# Altium PCB PlacaMãe.PcbDoc
Units mil, origin at the board's own origin, x right, y up, seen from the top; angles counter-clockwise.
Board outline 1560 x 3520 mil, 2 copper layers (Top Layer, Bottom Layer); 32 components, 25 nets, 148 pads, 54 vias.
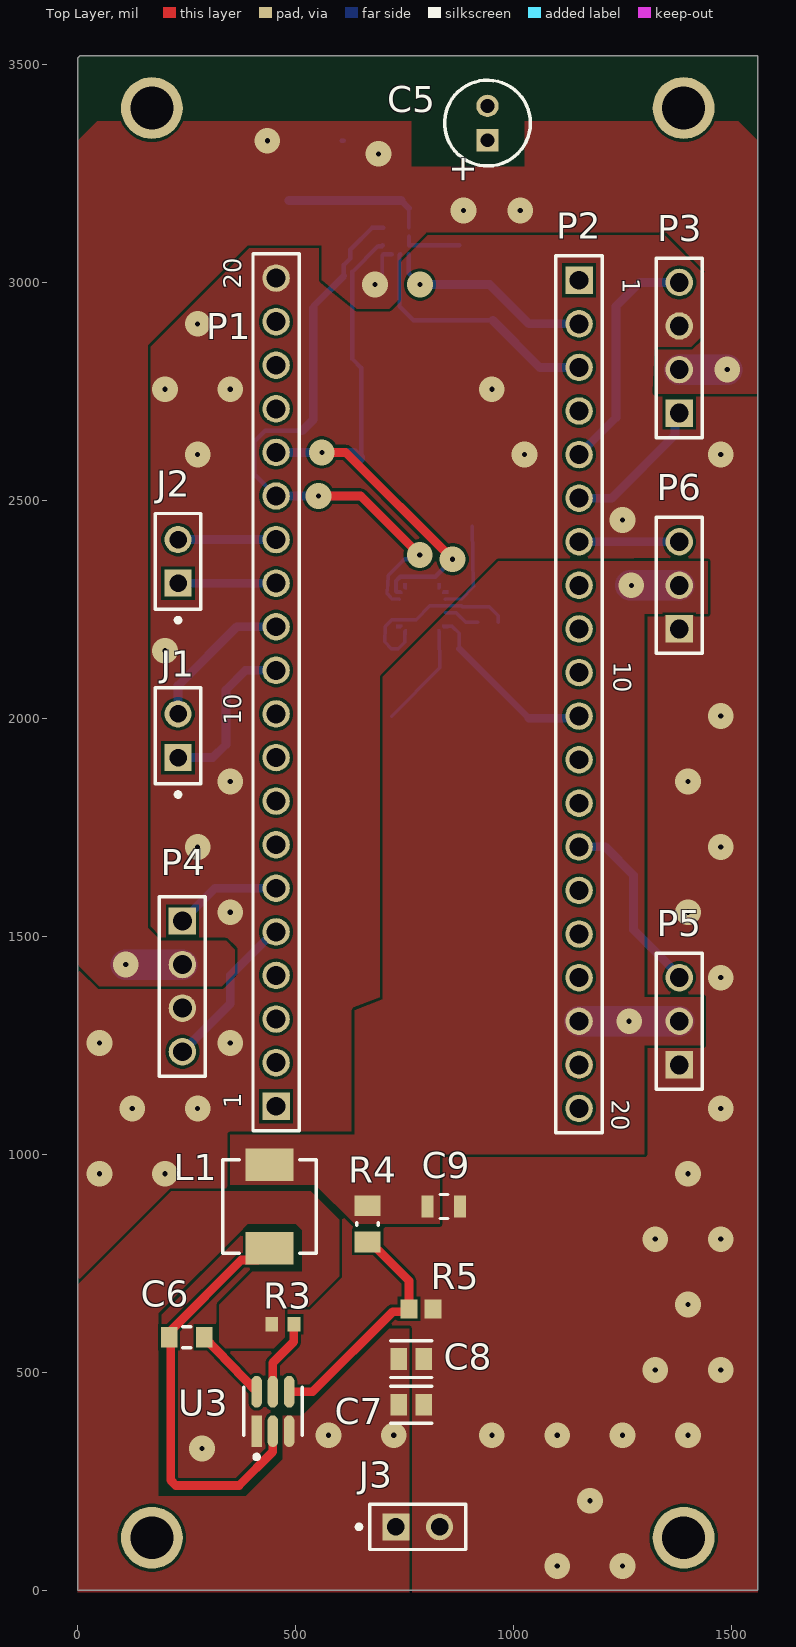
[diagram p0: Top Layer view]
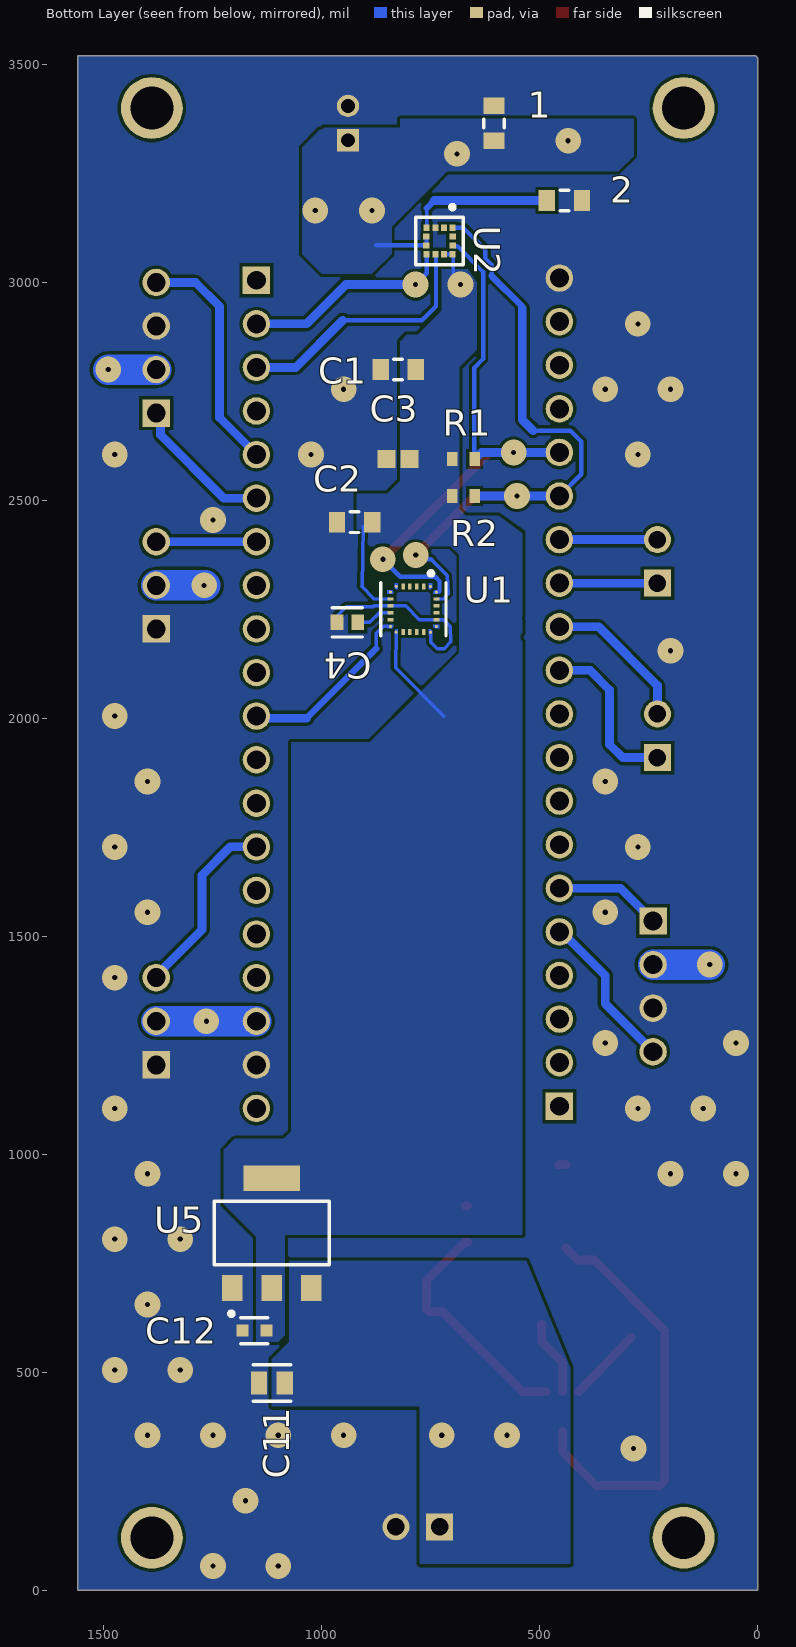
[diagram p1: Bottom Layer view, seen from below]
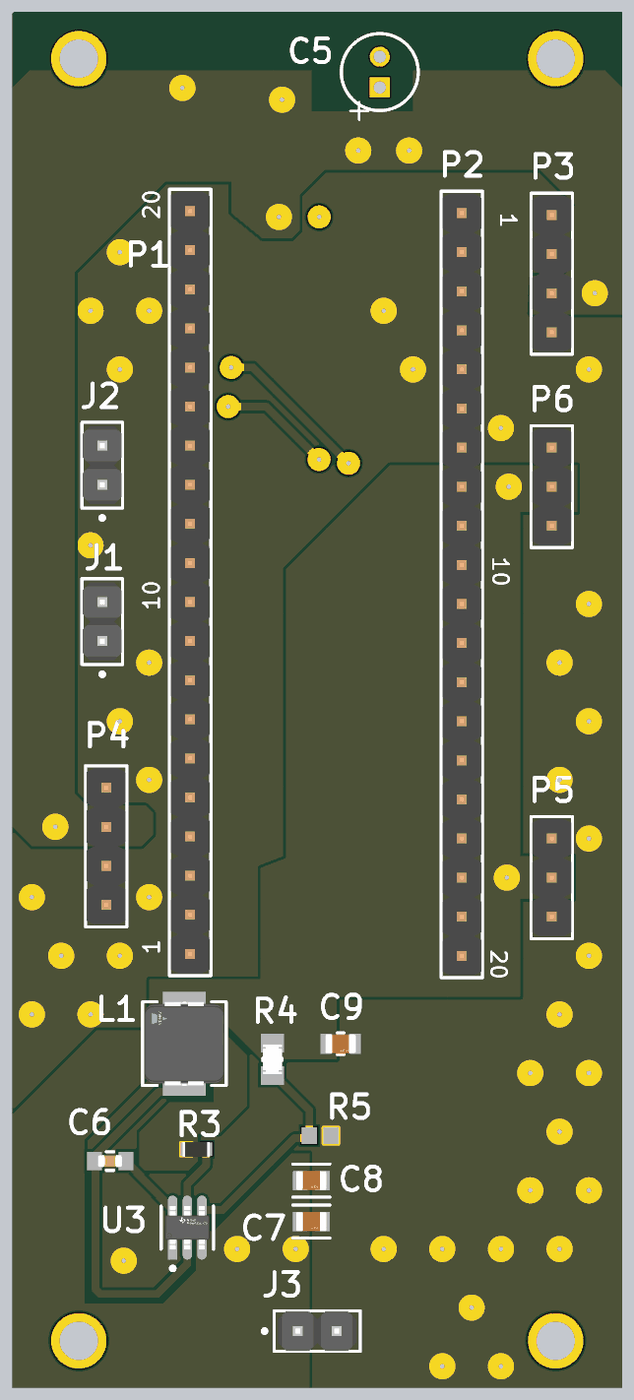
[diagram p2: 3D render of the assembled board from above, using the file's embedded part models]
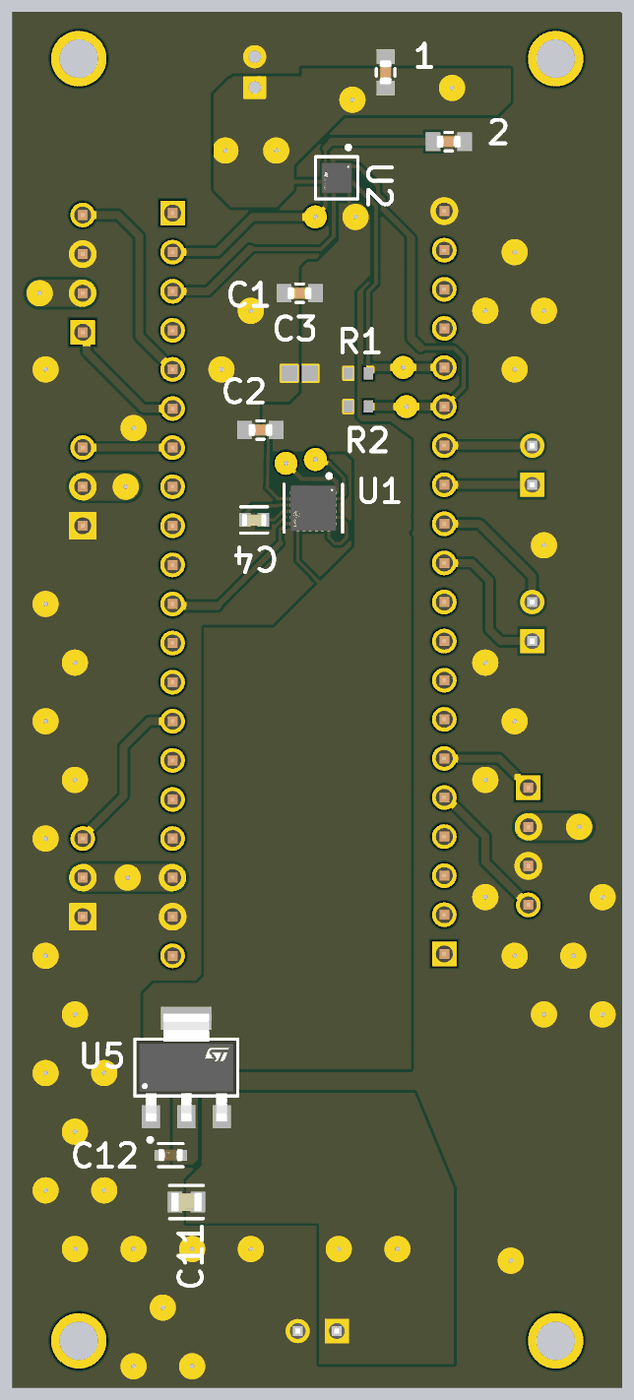
[diagram p3: 3D render of the assembled board from below, using the file's embedded part models]

## Layer stack, top to bottom
Top Solder: solder mask 0.4, Solder Resist, Dk 3.5
Top Layer: signal copper 1.4
Dielectric 1: dielectric 12.6, FR-4, Dk 4.8
Bottom Layer: signal copper 1.4
Bottom Solder: solder mask 0.4, Solder Resist, Dk 3.5

## Board outline
0,0 0,3515 5,3520 1560,3520 1560,0

## Design rules (kind name [scope] priority, off if disabled: settings)
Clearance [All] p1: gap=7 ignorepadtopadclearanceinfootprint=FALSE except(0: Arc-Hole Track-Hole SMDPad-Hole THPad-Hole Via-Hole Fill-Hole Poly-Hole Region-Hole Text-Hole; 5.9: Arc-SMDPad Track-SMDPad SMDPad-SMDPad; 10: Arc-THPad Arc-Text Track-THPad Track-Text SMDPad-THPad SMDPad-Text THPad-THPad THPad-Via THPad-Text Via-Text Fill-Text Poly-Text Region-Text Text-Text)
MinimumSolderMaskSliver [All] p1: minsoldermaskwidth=5
PlaneConnect [All] p1: planeconnectstyle=Direct reliefexpansion=20 reliefentries=4 reliefconductorwidth=10 reliefairgap=10
PolygonConnect [All] p1: connectstyle=Direct reliefconductorwidth=10 reliefentries=4 polygonreliefangle="90 Angle" airgapwidth=10
RoutingVias [All] p1: holewidth=28 width=50 viastyle="Through Hole" minholewidth=11.81 minwidth=59.06 maxholewidth=11.81 maxwidth=59.06
SilkToSolderMaskClearance [IsPad] p1: minsilkscreentomaskgap=7 clearancetoexposedcopper=TRUE
SolderMaskExpansion [All] p1: expansion=4 istentingtop=FALSE
Width [All] p1: maxlimit=200 minlimit=8 preferedwidth=20
27 further rules are at their usual default settings.

## Classes and differential pairs
component class PlacaMãe_Raw: C6 C7 C8 C9 C11 C12 J1 J2 J3 L1 P1 P2 P3 P4 P5 P6 R3 R4 R5 U3 U5
component class IMU: 1 2 C1 C2 C3 C4 C5 R1 R2 U1 U2

## Components (designator, comment, footprint, x,y, rotation, side; value= is the part's Value field where it differs from the comment)
1 "100nF 50V" FP-CGA3E-0_3-0_1-IPC_A 605,3365 r90 bottom
2 "100nF 50V" FP-CGA3E-0_3-0_1-IPC_A 443.56,3187.82 r180 bottom
C1 "100nF, 50V" FP-CGA3E-0_3-0_1-IPC_A 825,2800 r0 bottom
C2 "100nF, 50V" FP-CGA3E-0_3-0_1-IPC_A 925,2450 r0 bottom
C3 "1uF, 50V" CAPC1608X90X35ML10T25 825,2595 r180 bottom
C4 "470nF, 16V" FP-C0603C-CF-MFG 941.38,2220 r0 bottom value="0.47 μF"
C5 "1uF, 50V" CAPPR55-200-1100X500X1200 940,3365.63 r90 top
C6 "100nF, 50V" FP-CGA3E-0_3-0_1-IPC_A 250,580 r180 top
C7 "10uF, 16V" FP-GRM21B-0_1-IPC_C 765,425 r0 top
C8 "10uF, 16V" FP-GRM21B-0_1-IPC_C 765,530 r0 top
C9 "22uF 6,3V" FP-GRM21B-0_15-MFG 839.84,880 r0 top
C11 "100nF 50V" FP-C0805C-DN-MFG 1114.53,475 r0 bottom value="0.10 μF"
C12 "10uF, 10V" FP-C1608-080-MFG 1155,595 r0 bottom value=10uF
J1 "motor 1" FP-M20-9990246-MFG 230,1960 r90 top
J2 "motor 2" FP-M20-9990246-MFG 230,2360 r90 top
J3 "M20-9990246" FP-M20-9990246-MFG 780,145 r0 top
L1 "4.7uH, 1,2A" FP-IHLP-2020BZ-FP_1_905x2-MFG 440,880 r90 top
P1 "61302011121" 61302011121 455,2060 r90 top
P2 "61302011121" 61302011121 1150,2055 r270 top
P3 "encoder 1" 61300411121 1380,2850 r90 top
P4 "encoder 2" 61300411121 240,1385 r270 top
P5 "esc" 61300311121 1380,1305 r90 top
P6 "receiver" 61300311121 1380,2305 r90 top
R1 "4k7, 0.1W" RESC1608X55X25LL10T15 675,2595 r0 bottom
R2 "4k7, 0.1W" RESC1608X55X25LL10T15 675,2510 r0 bottom
R3 "10kOhm" RESC1609X55X30LL15T15 470.59,610 r0 top
R4 "5.6k 1%" FP-CRCW0805-e3-IPC_A 665,840 r90 top
R5 "10kOhm" RESC1608X55X30ML20T20 787.44,645 r180 top
U1 "BHI160B" FP-BHI160B-MFG 790,2250 r270 bottom
U2 "LIS3MDLTR" FP-VFLGA-12-8365767-MFG 730,3095 r270 bottom
U3 "TPS562201DDCR" FP-DDC0006A-IPC_A 447.6,409.71 r90 top
U5 "LD1117S33CTR" FP-SOT-223-0046067_14-MFG 1115,819.02 r90 bottom

## Footprints (in the part's own frame and the unit in brackets; to place one, negate y for a bottom-side part, rotate by r counter-clockwise, add the part's x,y. Pads: shape width x height; smd on the part's side, far side on the other; paste and mask are expansions set on the pad)
61300311121 [mm] "Pin Header, pitch 2.54 mm, THT, Vertical, single row, 3p"
  rect 1.6x1.6 hole 1.1: 1(-2.54,0)
  round 1.6 hole 1.1: 2(0,0) 3(2.54,0)
  silkscreen extent -3.96,-1.35 3.96,1.35, body extent -3.81,-1.27 3.81,1.27, height 8.57
61300411121 [mm] "Pin Header, pitch 2.54 mm, THT, Vertical, single row, 4p"
  rect 1.6x1.6 hole 1.1: 1(-3.81,0)
  round 1.6 hole 1.1: 2(-1.27,0) 3(1.27,0) 4(3.81,0)
  silkscreen extent -5.23,-1.35 5.23,1.35, body extent -5.08,-1.27 5.08,1.27, height 8.57
61302011121 [mm] "Pin Header, pitch 2.54 mm, THT, Vertical, single row, 20p"
  rect 1.6x1.6 hole 1.1: 1(-24.13,0)
  round 1.6 hole 1.1: 2(-21.59,0) 3(-19.05,0) 4(-16.51,0) 5(-13.97,0) 6(-11.43,0) 7(-8.89,0) 8(-6.35,0) 9(-3.81,0) 10(-1.27,0) 11(1.27,0) 12(3.81,0) 13(6.35,0) 14(8.89,0) 15(11.43,0) 16(13.97,0) 17(16.51,0) 18(19.05,0) 19(21.59,0) 20(24.13,0)
  silkscreen extent -25.55,-1.35 25.55,1.35, body extent -25.4,-1.27 25.4,1.27, height 8.57
CAPC1608X90X35ML10T25 [mm] "Chip Capacitor, 2-Leads, Body 1.70x0.90mm, IPC Low Density"
  rect 1.05x1.05 smd: 1(-0.675,0) 2(0.675,0)
  body extent -0.85,-0.45 0.85,0.45, height 0.9
CAPPR55-200-1100X500X1200 [mm] "THD, 2-Leads, Dia 5mm, Body Length 11mm"
  rect 1.3x1.3 hole 0.8: 1(-1,0)
  round 1.3 hole 0.8: 2(1,0)
  silkscreen extent -2.5,-2.5 2.5,2.5, body extent -2.5,-2.5 2.5,2.5, height 12
FP-BHI160B-MFG [mm]
  round 0.18 smd paste+0 mask+0: 1(-1.335,1) 6(-1.335,-1) 7(-1,-1.335) 12(1,-1.335) 13(1.335,-1) 18(1.335,1) 19(1,1.335) 24(-1,1.335)
  rect 0.35x0.2 smd paste+0 mask+0: 2(-1.335,0.6) 3(-1.335,0.2) 4(-1.335,-0.2) 5(-1.335,-0.6) 14(1.335,-0.6) 15(1.335,-0.2) 16(1.335,0.2) 17(1.335,0.6)
  rect 0.2x0.35 smd paste+0 mask+0: 8(-0.6,-1.335) 9(-0.2,-1.335) 10(0.2,-1.335) 11(0.6,-1.335) 20(0.6,1.335) 21(0.2,1.335) 22(-0.2,1.335) 23(-0.6,1.335)
  Top Layer region: -1.16,0.9 -1.51,0.9 -1.51,1.1 -1.241,1.1 -1.16,1.019
  Top Layer region: -1.16,-0.9 -1.51,-0.9 -1.51,-1.1 -1.241,-1.1 -1.16,-1.019
  Top Layer region: 1.16,-0.9 1.51,-0.9 1.51,-1.1 1.241,-1.1 1.16,-1.019
  Top Layer region: 1.16,0.9 1.51,0.9 1.51,1.1 1.241,1.1 1.16,1.019
  Top Layer region: -0.9,-1.16 -0.9,-1.51 -1.1,-1.51 -1.1,-1.241 -1.019,-1.16
  Top Layer region: 0.9,-1.16 0.9,-1.51 1.1,-1.51 1.1,-1.241 1.019,-1.16
  Top Layer region: 0.9,1.16 0.9,1.51 1.1,1.51 1.1,1.241 1.019,1.16
  Top Layer region: -0.9,1.16 -0.9,1.51 -1.1,1.51 -1.1,1.241 -1.019,1.16
  silkscreen extent -2.22,-1.9 1.55,1.9, body extent -1.5,-1.5 1.5,1.5, height 1
FP-C0603C-CF-MFG [mm] "Chip Capacitor, 2-Leads, Body 2.00x1.25mm, IPC Medium Density"
  rect 0.75x0.9 smd paste+0 mask+0: 1(-0.6,0) 2(0.6,0)
  silkscreen extent -0.87,-0.85 0.88,0.85, body extent -0.8,-0.4 0.8,0.4, height 0.87
FP-C0805C-DN-MFG [mm]
  rect 0.95x1.35 smd paste+0 mask+0: 1(-0.75,0) 2(0.75,0)
  silkscreen extent -1.1,-1.07 1.1,1.07, body extent -1,-0.63 1,0.62, height 0.88
FP-C1608-080-MFG [mm]
  rect 0.7x0.7 smd paste+0 mask+0: 1(-0.7,0) 2(0.7,0)
  silkscreen extent -0.8,-0.75 0.8,0.75, body extent -0.8,-0.4 0.8,0.4, height 0.9
FP-CGA3E-0_3-0_1-IPC_A [mm]
  rect 0.956x1.206 smd paste+0 mask+0: 1(-1.025,0) 2(1.025,0)
  silkscreen extent -0.25,-0.6 0.25,0.6, body extent -0.8,-0.4 0.8,0.4, height 1.1
FP-CRCW0805-e3-IPC_A [mil]
  rect 47.5x59.38 smd paste+0 mask+0: 1(-41.37,0) 2(41.37,0)
  silkscreen extent -3,-25 3,25, body extent -39,-25 39,25, height 20
FP-DDC0006A-IPC_A [mm]
  rect 1.854x0.612 smd paste+0 mask+0: 1(-1.15,0.95)
  rrect100% 1.854x0.612 smd paste+0 mask+0: 2(-1.15,0) 3(-1.15,-0.95) 4(1.15,-0.95) 5(1.15,0) 6(1.15,0.95)
  silkscreen extent -2.77,-1.7 1.4,1.7, body extent -1.4,-1.45 1.4,1.45, height 1.1
FP-GRM21B-0_1-IPC_C [mil]
  rect 37.71x49.69 smd paste+0 mask+0: 1(-28.63,0) 2(28.63,0)
  silkscreen extent -47,-42 47,42, body extent -39,-25 39,25, height 53
FP-GRM21B-0_15-MFG [mm]
  rect 0.7x1.3 smd paste+0 mask+0: 1(-0.95,0) 2(0.95,0)
  silkscreen extent -0.23,-0.7 0.23,0.7, body extent -1,-0.62 1,0.62, height 1.4
FP-IHLP-2020BZ-FP_1_905x2-MFG [mm]
  rect 1.905x2.79 smd paste+0 mask+0: 1(-2.425,0) 2(2.425,0)
  silkscreen extent -2.72,-2.72 2.72,2.72, body extent -2.74,-2.59 2.74,2.59, height 2
FP-M20-9990246-MFG [mm]
  rect 1.57x1.57 hole 1.02 paste-1000 mask+0: 1(-1.27,0)
  round 1.57 hole 1.02 paste-1000 mask+0: 2(1.27,0)
  silkscreen extent -3.55,-1.32 2.79,1.32, body extent -2.89,-1.42 2.89,1.42, height 0.25
FP-SOT-223-0046067_14-MFG [mm]
  rect 1.5x1.2 smd paste+0 mask+0: 1(-3.2,2.3) 2(-3.2,0) 3(-3.2,-2.3)
  rect 1.5x3.3 smd paste+0 mask+0: 4(3.2,0)
  silkscreen extent -4.82,-3.35 1.85,3.35, body extent -3.5,-3.25 3.5,3.25, height 1.9
FP-VFLGA-12-8365767-MFG [mm]
  rect 0.375x0.35 smd paste+0 mask+0: 1(-0.763,0.75) 2(-0.763,0.25) 3(-0.763,-0.25) 4(-0.763,-0.75) 7(0.763,-0.75) 8(0.763,-0.25) 9(0.763,0.25) 10(0.763,0.75)
  rect 0.35x0.375 smd paste+0 mask+0: 5(-0.25,-0.763) 6(0.25,-0.763) 11(0.25,0.763) 12(-0.25,0.763)
  silkscreen extent -2.1,-1.38 1.38,1.38, body extent -1,-1 1,1, height 1
RESC1608X55X25LL10T15 [mm] "Chip Resistor, 2-Leads, Body 1.60x0.80mm, IPC High Density"
  rect 0.6x0.8 smd: 1(-0.65,0) 2(0.65,0)
  body extent -0.85,-0.45 0.85,0.45, height 0.55
RESC1608X55X30ML20T20 [mm] "Chip Resistor, 2-Leads, Body 1.60x0.80mm, IPC Low Density"
  rect 1x1.1 smd: 1(-0.7,0) 2(0.7,0)
  body extent -0.9,-0.5 0.9,0.5, height 0.55
RESC1609X55X30LL15T15 [mm] "Chip Resistor, 2-Leads, Body 1.75x0.95mm, IPC High Density"
  rect 0.75x0.85 smd: 1(-0.65,0) 2(0.65,0)
  body extent -0.87,-0.47 0.88,0.48, height 0.55

## Part data
1 2 C1 C2 C6: library part CMP-2000-07546-2, "Cap Ceramic 100nF 50V X7R 10% Pad SMD 0603 +125°C Automotive T/R", Capacitance=100nF, Case Code (Imperial)=0603, Case Code (Metric)=1608, Dielectric=X7R, Max Operating Temperature=125°C, Min Operating Temperature=-55°C, Package Quantity=1, Ratings=AEC-Q200, Tolerance=10%, Voltage=50V, Case/Package=0603, Composition=Ceramic, Depth=0.8mm, Height=0.8mm, Lead Free="Lead Free", Length=1.6mm, Mount="Surface Mount", Packaging="Tape and Reel", Radiation Hardening=No, REACH SVHC="No SVHC", Termination=SMD/SMT, Thickness=0.035inch, Voltage Rating=50V, Voltage Rating (DC)=50V, Weight=7.1E-05oz, Width=0.8mm
C3: library part CMP-2000-05447-1, "Chip Capacitor, 1 uF, +/- 10%, 50 V, -55 to 85 degC, 0603 (1608 Metric), RoHS, Tape and Reel", Capacitance=1µF, Manufacturer="Taiyo Yuden", Operating Temperature=-55degC~85degC, Package / Case=0603(1608Metric), Package Description="2-Pin Surface Mount Device, Body 1.6 x 0.8 mm", Package Reference=603, Ratings=-, Standard Package=1, Temperature Coefficient=X5R, Tolerance=±10%, Voltage - Rated=50V, Applications=GeneralPurpose, Catalog Drawings=xMKSeries_0603_0.8, Category=Capacitors, Datasheet URL=https://datasheet.ciiva.com/15922/336umk107bj105ka-t-15922611.pdf, Datasheet Version=Mar-13, Family=CeramicCapacitors, Features=-, Height - Seated (Max)=-, Lead Spacing=-, Lead Style=-, Manufacturer URL=http://www.t-yuden.com/, Mounting Type=SurfaceMount,MLCC, Online Catalog=MSeries, Other Names=587-2400-6, Packaging=Digi-Reel, Series=M, Size / Dimension="0.063\"Lx0.031\"W(1.60mmx0.80mm)", Thickness (Max)="0.035\"(0.90mm)"
C4: library part CMP-2006-03235-2, "CAP CER 0.47UF 16V X7R 0603", Capacitance="0.47 μF", Manufacturer=KEMET, Manufacturer Part Number=C0603C474K4RACTU, Package=C0603C-CF, Temperature="-55°C to +125°C", Temperature Characteristic=X7R, Temperature Coefficient=30ppm/°C, Temperature Range High=+125°C, Temperature Range Low=-55°C, Tolerance=0.1, Voltage Rating="16 V", Automotive=Yes, Automotive Grade="Grade 1", Category=Cap, ComponentLink2Description=Datasheet, ComponentLink2URL=https://api.kemet.com/component-edge/download/datasheet/C0603C100J5GACAUTO.pdf, Device Class L1="Passive Components", Device Class L2=Capacitors, Device Class L3="Ceramic Capacitors", Digikey Description="CAP CER 0.47UF 16V X7R 0603", Height=0.87mm, Lead Free=Yes, Material=Ceramic, Mouser Description="0603 C 470nF Ceramic Multilayer Capacitor, 16 V, +125degC, X7R Dielec, +/-10%", Octopart=https://octopart.com/c0603c474k4ractu-kemet-109683, RoHS=TRUE
C5: library part CMP-1665-00039-1, "Aluminum Electrolytic Capacitor, 1 uF, +/- 20%, 50 V, -55 to 105 degC, 2-Pin THD, RoHS, Bulk", Max Operating Temperature="70 degC", Min Operating Temperature="-30 degC", Package Quantity=150, Channels=2, ComponentLink1Description="Manufacturer URL", ComponentLink1URL=http://www.panasonic.com/, ComponentLink2Description=Datasheet, ComponentLink2URL=https://datasheet.ciiva.com/7275/94060-7275472.pdf, DatasheetVersion=Mar-05, Mount="Through Hole", PackageDescription="2-Pin Radial Lead, Dia 5 mm, Body Length 11 mm", PackageReference=CAPPR55-200-1100X500X1200, Packaging=Bulk, Radiation Hardening=No, RoHSCompliant=true
C7 C8: library part CMP-2007-03453-2, "Chip Multilayer Ceramic Capacitors for General Purpose, 0805, 10uF, X5R, 15%, 10%, 16V", Capacitance=10uF, Case Code (Imperial)=0805, Case Code (Metric)=2012, Dielectric=X5R, Max Operating Temperature=85°C, Min Operating Temperature=-55°C, Package Quantity=1, Tolerance=10%, Voltage=16V, Case/Package=0805, Depth=1.25mm, Height=1.25mm, Lead Free="Lead Free", Length=2mm, Material=Ceramic, Mount="Surface Mount", Packaging="Tape and Reel", Radiation Hardening=No, REACH SVHC="No SVHC", Termination=SMD/SMT, Thickness=0.053inch, Voltage Rating=16V, Voltage Rating (DC)=16V, Width=1.25mm
C9: library part CMP-2007-03385-2, "Chip Multilayer Ceramic Capacitors for General Purpose, 0805, 22uF, X5R, 15%, 20%, 6.3V", Capacitance=22uF, Case Code (Imperial)=0805, Case Code (Metric)=2012, Dielectric=X5R, Max Operating Temperature=85°C, Min Operating Temperature=-55°C, Package Quantity=1, Tolerance=20%, Voltage=6.3V, Case/Package=0805, Depth=1.25mm, Height=1.25mm, Lead Free="Lead Free", Length=2mm, Material=Ceramic, Mount="Surface Mount", Packaging="Tape and Reel", Radiation Hardening=No, REACH SVHC="No SVHC", Termination=SMD/SMT, Thickness=0.053inch, Voltage Rating=6.3V, Voltage Rating (DC)=6.3V, Width=0.049inch
C11: library part CMP-2007-00279-2, "CAP CER 0.1UF 50V X7R 0805", Capacitance="0.10 μF", Manufacturer=KEMET, Manufacturer Part Number=C0805C104K5RACTU, Package=C0805C-DN, Temperature="-55°C to +125°C", Temperature Characteristic=X7R, Temperature Coefficient=30ppm/°C, Temperature Range High=+125°C, Temperature Range Low=-55°C, Tolerance=0.1, Voltage Rating="50 V", Automotive=No, Category=Cap, ComponentLink2Description=Datasheet, ComponentLink2URL=https://content.kemet.com/datasheets/KEM_C1003_C0G_SMD.pdf, Device Class L1="Passive Components", Device Class L2=Capacitors, Device Class L3="Ceramic Capacitors", Digikey Description="CAP CER 0.1UF 50V X7R 0805", Height=0.88mm, Ipc Land Pattern Name=CAPC200125X78, Lead Free=Yes, Material=Ceramic, Mouser Description="Cap Ceramic 0.1uF 50V X7R 10% SMD 2.0 x 1.2 mm 125 C Paper T/R", Octopart=https://octopart.com/c0805c104k5ractu-kemet-143926, RoHS=TRUE
C12: library part CMP-2000-04979-2, "CAP CER 10UF 10V X5R 0603", Capacitance=10uF, Manufacturer=TDK, Manufacturer Part Number=C1608X5R1A106K080AC, Package=C1608-080, Temperature="-55°C to +85°C", Temperature Characteristic=X5R, Temperature Coefficient=15%, Temperature Range High=+85°C, Temperature Range Low=-55°C, Tolerance=10%, Voltage=10V, Automotive=No, Category=Cap, ComponentLink2Description=Datasheet, ComponentLink2URL=https://product.tdk.com/info/en/documents/chara_sheet/C1608X5R1A106K080AC.pdf, Device Class L1="Passive Components", Device Class L2=Capacitors, Device Class L3="Ceramic Capacitors", Digikey Description="CAP CER 10UF 10V X5R 0603", Footprint Url=https://product.tdk.com/info/en/catalog/spec/mlccspec_commercial_general_midvoltage_en.pdf, Height=0.9mm, Ipc Land Pattern Name=CAPC16080X80, Lead Free=Yes, Material=Ceramic, Mouser Description="CAP CER 10UF 10V X5R 0603", Octopart=https://octopart.com/c1608x5r1a106k080ac-tdk-26013468, RoHS=TRUE, Voltage Rating=10V
J1 J2: library part CMP-15831-000009-1, "CONN HEADER VERT 2POS 2.54MM", Current Rating=3A, Manufacturer=Harwin, Manufacturer Part Number=M20-9990246, Temperature="-40°C to +105°C", Temperature Range High=+105°C, Temperature Range Low=-40°C, Automotive=No, Category=Conn, ComponentLink2Description=Datasheet, ComponentLink2URL=https://cdn.harwin.com/pdfs/M20-999.pdf, Conn Gender=Male, Conn Orientation=Vertical, Contact Material=Tin,Nickel, Device Class L1=Connectors, Device Class L2="Headers and Wire Housings", Device Class L3=unset, Digikey Description="CONN HEADER VERT 2POS 2.54MM", Height=8.99mm, Lead Free=Yes, Mouser Description="2.54mm (0.1\") Pitch SIL Vertical PC Tail Pin Header, 6.1mm mating pin height, tin, 2 contacts", Number Of Contacts=2, Number Of Rows=1, Octopart=https://octopart.com/m20-9990246-harwin-2590635, Package=M20-9990246, Pitch=2.54mm, RoHS=TRUE
J3: library part CMP-15831-000009-1, "CONN HEADER VERT 2POS 2.54MM", Current Rating=3A, Manufacturer=Harwin, Temperature="-40°C to +105°C", Temperature Range High=+105°C, Temperature Range Low=-40°C, Automotive=No, Category=Conn, ComponentLink2Description=Datasheet, ComponentLink2URL=https://cdn.harwin.com/pdfs/M20-999.pdf, Conn Gender=Male, Conn Orientation=Vertical, Contact Material=Tin,Nickel, Device Class L1=Connectors, Device Class L2="Headers and Wire Housings", Device Class L3=unset, Digikey Description="CONN HEADER VERT 2POS 2.54MM", Height=8.99mm, Lead Free=Yes, Manufacturer Part Number=M20-9990246, Mouser Description="2.54mm (0.1\") Pitch SIL Vertical PC Tail Pin Header, 6.1mm mating pin height, tin, 2 contacts", Number Of Contacts=2, Number Of Rows=1, Octopart=https://octopart.com/m20-9990246-harwin-2590635, Package=M20-9990246, Pitch=2.54mm, RoHS=TRUE
L1: library part CDRH2D18_HPNP-4R7NC, "Inductor", Arrow Part Number=CDRH2D18/HPNP-4R7NC, Manufacturer_Name=Sumida, Mouser Part Number=851-CDRH2D18HP-4R7NC, Arrow Price/Stock=https://www.arrow.com/en/products/cdrh2d18hpnp-4r7nc/sumida, Datasheet Link=https://products.sumida.com/products/pdf/CDRH2D18HP.pdf, Height=1mm, Manufacturer_Part_Number=CDRH2D18/HPNP-4R7NC, Mouser Price/Stock=https://www.mouser.co.uk/ProductDetail/Sumida/CDRH2D18-HPNP-4R7NC?qs=%2Fk4tzQy0az%2FNmO92%2F%252BEfMw%3D%3D
P1 P2: library part CMP-1502-01102-1, "THT Vertical Pin Header WR-PHD, Pitch 2.54 mm, Single Row, 20 pins", Contact Resistance=20mOhm, Manufacturer="Wurth Elektronik", Operating Temperature=-40to105degC, Rated Current=3A, Withstanding Voltage=500VAC, Working Voltage=250VAC, Datasheet URL=https://katalog.we-online.de/em/datasheet/6130xx11121.pdf, Gender=Male, Manufacturer URL=http://www.we-online.de, Mounting Technology=THT, Orientation=Vertical, Package Reference=61302011121, Packaging=Bag, Part Number=61302011121, Pin Number=20, Pitch=2.54mm, Publisher=WurthElektronik, Row Number=Single
P3 P4: library part CMP-1502-01064-1, "THT Vertical Pin Header WR-PHD, Pitch 2.54 mm, Single Row, 4 pins", Contact Resistance=20mOhm, Manufacturer="Wurth Elektronik", Operating Temperature=-40to105degC, Package Reference=61300411121, Rated Current=3A, Withstanding Voltage=500VAC, Working Voltage=250VAC, Datasheet URL=https://katalog.we-online.de/em/datasheet/6130xx11121.pdf, Gender=Male, Manufacturer URL=http://www.we-online.de, Mounting Technology=THT, Orientation=Vertical, Packaging=Bag, Part Number=61300411121, Pin Number=4, Pitch=2.54mm, Publisher=WurthElektronik, Row Number=Single
P5 P6: library part CMP-1502-01062-1, "THT Vertical Pin Header WR-PHD, Pitch 2.54 mm, Single Row, 3 pins", Contact Resistance=20mOhm, Manufacturer="Wurth Elektronik", Operating Temperature=-40to105degC, Package Reference=61300311121, Rated Current=3A, Withstanding Voltage=500VAC, Working Voltage=250VAC, Datasheet URL=https://katalog.we-online.de/em/datasheet/6130xx11121.pdf, Gender=Male, Manufacturer URL=http://www.we-online.de, Mounting Technology=THT, Orientation=Vertical, Packaging=Bag, Part Number=61300311121, Pin Number=3, Pitch=2.54mm, Publisher=WurthElektronik, Row Number=Single
R1 R2: library part CMP-2000-06942-1, "Chip Resistor, 4.7 KOhm, +/- 1%, 0.1 W, -55 to 155 degC, 0603 (1608 Metric), RoHS, Tape and Reel", Case Code - in=0603, Case Code - mm=1608, Manufacturer=Yageo, Operating Temperature Range=-55Cto+155C, Package Description="2-Pin Surface Mount Device, Body 1.6 x 0.8 mm", Power Rating=100mW, Resistance=4.7kOhms, Temperature Coefficient=100PPM/C, Tolerance=1%, Voltage Rating=50V, Datasheet URL=http://www.yageo.com/documents/recent/PYu-RC_Group_51_RoHS_L_7.pdf, Datasheet Version="Rev. 7, 05/2017", Manufacturer URL=http://www.yageo.com/, Mounting Technology=SurfaceMount, Package Reference=0603, Packaging=Reel, Product=ThickFilmResistorsGeneralPurpose, Series=RC, Termination Style=SMD/SMT
R3: library part CMP-1012-00623-3, "Chip Resistor, 10 KOhm, +/- 1%, 0.1 W, -55 to 155 degC, 0603 (1608 Metric), RoHS, Tape and Reel", Case Code (Imperial)=0603, Case Code (Metric)=1608, Manufacturer=Panasonic, Max Operating Temperature=155degC, Max Power Dissipation=100mW, Min Operating Temperature=-55degC, Package Description="2-Pin Surface Mount Device, Body 1.6 x 0.85 mm", Package Quantity=1, Package Reference=603, Resistance=10KOhm, Temperature Coefficient=100ppm\/degreesC, Tolerance=1%, Voltage Rating=75V, Case\/Package=0603, Composition=ThickFilm, Contact Plating=Tin, Datasheet URL=https://industrial.panasonic.com/cdbs/www-data/pdf/RDA0000/AOA0000C304.pdf, Datasheet Version=02/2017, Depth=0.8mm, Height=0.45mm, Lead Free=LeadFree, Length=1.6mm, Manufacturer URL=http://www.panasonic.com/, Military Standard=Not, Mount=SurfaceMount, Mounting Technology=SurfaceMount, Number of Pins=2, Number of Terminations=2, Packaging=TapeandReel, Power Rating=100mW, Radiation Hardening=No, REACH SVHC=NoSVHC, RoHSCompliant=true, Termination=SMD/SMT, Voltage Rating (DC)=75V, Width=0.031inch
R4: library part CMP-2001-04030-2, "RES Thick Film, 5.6kΩ, 1%, 0.125W, 100ppm/°C, 0805", Case Code (Imperial)=0805, Case Code (Metric)=2012, Max Operating Temperature=155°C, Max Power Dissipation=125mW, Min Operating Temperature=-55°C, Package Quantity=1, Resistance=5.6kR, Temperature Coefficient=100ppm/°C, Tolerance=1%, Voltage Rating=150V, Case/Package=0805, Composition="Thick Film", Contact Plating=Tin, Depth=1.25mm, Features="Automotive AEC-Q200", Height=0.45mm, Lead Free="Lead Free", Length=2mm, Military Standard=Not, Mount="Surface Mount", Number of Pins=2, Number of Terminations=2, Packaging="Tape and Reel", Power Rating=125mW, Radiation Hardening=No, Termination=SMD/SMT, Voltage Rating (DC)=150V, Weight=0.000194oz, Width=1.25mm
R5: library part CMP-2000-00874-1, Manufacturer=Panasonic, Part Number=ERA-3AEB103V
U1: library part CMP-191067-000004-1, "IMU ACCEL/GYRO 3-AXIS I2C 24LGA", Ambient Temperature Range High=+85°C, Ambient Temperature Range Low=-40°C, Manufacturer="Bosch Sensortec", Max Supply Voltage=3.6V, Min Supply Voltage=1.6V, Operating Supply Current=300-800uA, Package=0, Temperature="-40°C to +85°C", Accel Range=2/4/8/16g, Accel Resolution=16bits, Accel Sensitivity=2048/4096/8192/16384LSB/g, Automotive=No, Category=IC, ComponentLink2Description=Datasheet, ComponentLink2URL=https://ae-bst.resource.bosch.com/media/_tech/media/datasheets/BST-BHI160B-DS000.pdf, Device Class L1=Sensors, Device Class L2="Motion Sensors", Device Class L3="Inertial Measurement Units (IMUs)", Digikey Description="IMU ACCEL/GYRO 3-AXIS I2C 24LGA", Gyro Range=125/250/500/1000/2000°/s, Gyro Sensitivity=16.4/32.8/65.6/131.2/262.4LSB/°/s, Height=1mm, Lead Free=Yes, Manufacturer Part Number=BHI160B, Octopart=https://octopart.com/bhi160b-bosch+sensortec-108216126, Resolution=16bits, RoHS=TRUE, Sensor Output=I2C, Sensor Type=Temperature,Accelerometer,Gyroscope, Temperature Range High=+85°C, Temperature Range Low=-40°C
U2: library part CMP-2000-07463-2, "SENSOR MR I2C/SPI 12LGA", Manufacturer=STMicroelectronics, Max Supply Voltage=3.6V, Min Supply Voltage=1.71V, Operating Supply Current=40-270uA, Package=VFLGA-12-8365767, Temperature="-40°C to +85°C", Temperature Range High=+85°C, Temperature Range Low=-40°C, Automotive=No, Category=IC, ComponentLink2Description=Datasheet, ComponentLink2URL=https://www.st.com/resource/en/datasheet/lis3mdl.pdf, Device Class L1=Sensors, Device Class L2="Magnetic Sensors", Device Class L3=unset, Digikey Description="SENSOR MR I2C/SPI 12LGA", Footprint Url=https://www.st.com/content/ccc/resource/technical/document/technical_note/73/17/9c/16/dd/96/4a/01/CD00134799.pdf/files/CD00134799.pdf/jcr:content/translations/en.CD00134799.pdf, Height=1mm, Lead Free=Yes, Manufacturer Part Number=LIS3MDLTR, Mouser Description="Board Mount Hall Effect / Magnetic Sensors Ultra Lo-Pwr Hi Perf 3-Axis 1.9-3.6V", Octopart=https://octopart.com/lis3mdltr-stmicroelectronics-29403125, RoHS=TRUE, Sensing Method=Magnetic, Sensor Output=I2C,SPI
U3: library part CMP-04918-000361-1, "IC REG BUCK ADJ 2A TSOT23-6", Case/Package=SOT, Max Input Voltage=17V, Max Operating Temperature=125°C, Max Output Current=2A, Min Input Voltage=4.5V, Min Operating Temperature=-40°C, Output Voltage=7V, Quiescent Current=400uA, Switching Frequency=580kHz, Contact Plating=Tin, Lead Free="Lead Free", Mount="Surface Mount", Number Of Outputs=1, Number of Pins=6, Operating Supply Voltage=17V, Output Type=Adjustable, RoHS Compliant=Yes
U5: library part CMP-0244-00307-2, "IC REG LINEAR 3.3V 800MA SOT223", Case/Package=SOT-223, Dropout Voltage=1.1V, Input Bias Current=5mA, Max Input Voltage=15V, Max Operating Temperature=125°C, Max Output Current=1.3A, Max Output Voltage=3.3V, Max Power Dissipation=12W, Min Input Voltage=5.3V, Min Operating Temperature=-40°C, Output Current=950mA, Output Voltage Accuracy=1%, Package Quantity=1, Quiescent Current=10mA, Accuracy=1%, Contact Plating=Tin, Height=1.8mm, Lead Free="Lead Free", Length=6.5mm, Max Supply Voltage=15V, Min Output Voltage=3.3V, Min Supply Voltage=3.3V, Mount="Surface Mount", Nominal Output Voltage=3.3V, Number Of Outputs=1, Number of Pins=4, Number of Regulators=1, Number of Terminals=4, Output Type=Fixed, Output Voltage=3.3V, Packaging="Tape and Reel", Polarity=Positive, Power Dissipation=12W, Radiation Hardening=No, REACH SVHC="No SVHC", Termination=SMD/SMT, Weight=0.01lb, Width=3.5mm

## Free pads (board coordinates)
  round 141.73 hole 98.43: 3(170,120) 3(170,3400) 3(1390,120) 3(1390,3400)

## Via types
v1: diameter 59.06, hole 11.81, Top Layer to Bottom Layer, 54 vias

## Nets (pads, with @x,y where several pads share a name; then routed paths per layer and width w, separated by ;. In a path a pad name is that pad's centre, name@x,y a point inside that pad or via, vN(x,y) a via of type N, cw(c..) or ccw(c..) an arc to the next point about the centre after c; other vN are vias at no path point)
+3.3: 1.1 C1.1 C2.1 C3.2 C5.1 C12.1 P3.2 P4.2 R1.2 R2.2 U1.8 U1.13 U2.5 U2.6 U2.9 U2.10 U5.2 U5.4 | length 939.4
  Bottom Layer w8: v1@677,3000 v1@677,3007.75 ; v1(682,2995) 698.29,3011.29 698.29,3062.8 U2.10 ; 720.66,2004.65 830.19,2116.41 U1.13 ; U1.8 880.83,2274.4 907.51,2302.2 ; 904.69,2440.2 907.51,2302.2 ; 908.71,2303.45 907.51,2302.2
  Bottom Layer w10: 1.1 1.1@609.92,3324.65 ; U2.10 719.67,3064.98 720.16,3064.49 U2.9 ; U2.5 U2.6 875,3085.16
  Bottom Layer w70: v1(110,1435) P4.2 ; P3.2 v1(1490,2800)
  other v1: 885,3165 1015,3165 690,3295 435,3325
+5: C9.1 L1.2 P2.18 P5.2 P6.2 R4.2 | length 368.2
  Top Layer w20: L1.2@440.86,976.35 L1.2 L1.2@457.42,975.49 ; R4.2 R4.2@670.94,881.37 ; P2.18@1149.14,1305.86 P2.18
  Bottom Layer w70: P2.18 v1(1265,1305) P5.2 ; v1@1267.55,2305 v1(1270,2305) P6.2
GND: 1.2 2.2 C1.2 C2.2 C3.1 C4.2 C5.2 C7.2 C8.2 C9.2 C11.2 C12.2 J3.2 P1.20 P2.19 P3.3 P4.3 P5.1 P6.1 R5.1 U1.9 U1.18 U1.20 U2.3 U3.1 U5.1 | length 417.3
  Bottom Layer w8: U1.18 750.29,2174.7 734.92,2159.78 719.55,2160.01 704.49,2175.53 705.01,2210.45 721.66,2226.61 U1.20 776.38,2226.38 807.87,2257.87 U1.9 ; U1.9@845.45,2257.87 880.26,2257.87 882.13,2256 944,2256 965,2235 C4.2
  other v1: 1100,55 1250,55 1175,205 285,325 950,355 1100,355 1250,355 1400,355 1325,505 1475,505 1400,655 1325,805 1475,805 50,955 200,955 1400,955 125,1105 275,1105 1475,1105 50,1255 350,1255 1475,1405 350,1555 1400,1555 275,1705 1475,1705 350,1855 1400,1855 1475,2005 200,2155 1250,2455 275,2605 1025,2605 1475,2605 200,2755 350,2755 950,2755 275,2905
Net2_1: 2.1 U2.4 | length 328.2
  Bottom Layer w8: U2.4 759.53,3170.41
  Bottom Layer w15: 742.12,3187.82 759.53,3170.41
  Bottom Layer w20: 2.1 742.12,3187.82
NetC4_1: C4.1 U1.10 | length 84.4
  Bottom Layer w8: U1.10 867.87,2242.13 890,2220 C4.1
NetC6_1: C6.1 U3.6 | length 173.2
  Top Layer w20: C6.1 U3.6
NetJ1_1: J1.1 P1.11 | length 381.1
  Bottom Layer w20: J1.1 310,1910 340,1940 340,2065 385,2110 P1.11
NetJ1_2: J1.2 P1.12 | length 348.9
  Bottom Layer w10: P1.12 P1.12@457.11,2207.89
  Bottom Layer w20: J1.2 230,2075 365,2210 P1.12
NetJ2_1: J2.1 P1.13 | length 225
  Bottom Layer w20: J2.1 P1.13
NetJ2_2: J2.2 P1.14 | length 225
  Bottom Layer w20: J2.2 P1.14
NetP1_5: P1.5 P4.4 | length 367
  Bottom Layer w20: P4.4 350,1345 350,1410 450,1510 P1.5
NetP1_6: P1.6 P4.1 | length 246.1
  Bottom Layer w20: P4.1 315,1610 P1.6
NetP1_15: P1.15 R2.1 U1.23 U2.1 | length 1471.9
  Top Layer w20: v1(552.1,2510) 649.2,2510 v1(784.6,2374.6)
  Bottom Layer w8: U1.23 720.2,2274.77 709.47,2287.04 710.82,2307.28 712.17,2327.52 747.82,2363.17
  Bottom Layer w10: P1.15 405,2560 405,2635 430,2660 515,2660 ; 610.5,3015 610.5,3040.5 625,3055 625,3075 675.02,3125.02 U2.1 ; 747.82,2363.17 749.86,2365.21 775.21,2365.21 v1(784.6,2374.6)
  Bottom Layer w15: 540,2940 540,2944.5 610.5,3015
  Bottom Layer w20: P1.15 v1(552.1,2510) R2.1 ; 515,2660 540,2685 540,2940
NetP1_16: P1.16 R1.1 U1.24 U2.11 | length 1333.7
  Top Layer w20: v1(560,2610) 615,2610 v1(860,2365)
  Bottom Layer w10: P1.16 P1.16@470,2595 ; R1.1 650,2595.59 650,2804.24 630,2824.24 630,3024.19 689.07,3083.27 698.09,3083.27 U2.11 ; 730.55,2290.77 730,2291.32 730,2315 740,2325 820,2325 v1(860,2365)
  Bottom Layer w20: P1.16 634.41,2610 643.66,2600.75 647.6,2600.75 649.41,2598.94 R1.1
NetP2_2: P2.2 U2.7 | length 491.4
  Bottom Layer w10: U2.7 759.53,3021.3 775,3005.82 v1@775,2995 ; P2.2 P2.2@1152.77,2905
  Bottom Layer w20: v1@775,2995 945,2995 1035,2905 P2.2
  other v1: 785,2995
NetP2_3: P2.3 U2.8 | length 591.2
  Bottom Layer w10: U2.8 738,3063.14 738,2945.3 770.1,2913.2 951.8,2913.2 ; P2.3 P2.3@1150.64,2805
  Bottom Layer w20: 951.8,2913.2 1060,2805 P2.3
NetP2_5: P2.5 P3.4 | length 543
  Bottom Layer w20: P2.5 1235,2690 1235,2945 1290,3000 P3.4
NetP2_6: P2.6 P3.1 | length 334.2
  Bottom Layer w20: P2.6 1225,2505 1370.22,2650.22 1370.22,2690.22 P3.1
NetP2_7: P2.7 P6.3 | length 225
  Bottom Layer w20: P2.7 P6.3@1375,2405
NetP2_11: P2.11 U1.12 | length 415.8
  Bottom Layer w8: U1.12 859.37,2210.63 875,2195 875,2160
  Bottom Layer w15: 875,2160 1035,2000
  Bottom Layer w20: 1035,2000 P2.11@1150.65,2000
NetP2_14: P2.14 P5.3 | length 425.4
  Bottom Layer w20: P2.14 1210,1705 1275,1640 1275,1515 P5.3@1380,1410
NetR3_2: R3.2 U3.5 | length 175.1
  Top Layer w20: U3.5 447.6,521.5 495.79,569.69 495.79,603.27 496.18,603.66 R3.2
NetR4_1: R4.1 R5.2 U3.4 | length 550.4
  Top Layer w20: U3.4 538.72,455 722.42,638.7 753.58,638.7 R5.2 759.88,709.69 670.94,798.63 R4.1 R4.1@664.71,798.34
SW: C6.2 L1.1 U3.2 | length 954.9
  Top Layer w20: C6.2@213.24,583.44 213.24,251.72 224.96,240 370,240 447.6,317.6 U3.2 ; C6.2@213.48,595.14 375.34,757.01 412.5,757.01 L1.1
VBat: C7.1 C8.1 C11.1 J3.1 R3.1 U3.3 U5.3
  other v1: 575,355 725,355
pads on no net: P1.1 P1.2 P1.3 P1.4 P1.7 P1.8 P1.9 P1.10 P1.17 P1.18 P1.19 P2.1 P2.4 P2.8 P2.9 P2.10 P2.12 P2.13 P2.15 P2.16 P2.17 P2.20 U1.1 U1.2 U1.3 U1.4 U1.5 U1.6 U1.7 U1.11 U1.14 U1.15 U1.16 U1.17 U1.19 U1.21 U1.22 U2.2 U2.12

## Polygon pours and split planes (outlines as drawn)
GND on Bottom Layer "GND_L02_P088" (solid, pour order 88): 0,3520 0,0 1560,0 1560,3520
+3.3 on Bottom Layer "+3.3_L02_P079" (solid, pour order 79): 1025,815 540,815 540,2115 540,2425 595,2465 670,2465 685,2480 685,2860 705,2880 805,2880 820,2865 820,2545 850,2515 920,2515 920,2425 890,2395 705,2395 685,2375 685,2150 890,1945 1070,1945 1070,1052.5 1087.5,1035 1085,1032.5 1085,1010
VBat on Bottom Layer "VBAT_L02_P074" (solid, pour order 74): 775,60 775,421.25 1115,421.25 1115,530 1075,570 1075,755 975,755 531.25,755 430,510 430,60
+3.3 on Bottom Layer "+3.3_L02_P080" (solid, pour order 80): 685,2785 685,2805 645,2845 645,3000 665,3030 725,3030 725,2935 790,2870 790,2845
+3.3 on Bottom Layer "+3.3_L02_P087" (solid, pour order 87): 285,3375 285,3290 320,3255 712.5,3255 840,3127.5 850,3137.5 850,3285 820,3315 820,3375
+3.3 on Bottom Layer "+3.3_L02_P083" (solid, pour order 83): 755,3275 840,3190 840,3065 885,3020 1000,3020 1045,3065 1045,3310 1005,3350 865,3350
+3.3 on Bottom Layer "+3.3_L02_P082" (solid, pour order 82): 1045,3305 575,3275 545,3305 545,3355 565,3375 820,3375 820,3355 995,3355
+3.3 on Bottom Layer "+3.3_L02_P075" (solid, pour order 75): 1150,570 1150,810 1225,885 1225,1010 1200,1035 975,1035 950,1010 950,890 1025,815 1085,815 1085,585 1100,570
GND on Top Layer "GND_L01_P090" (solid, pour order 90): 0,3210 1560,3210 1560,-5 0,-5
VBat on Top Layer "VBAT_L01_P069" (solid, pour order 69): 760,185 760,60 760,-5 0,-5 0,700 215,915 535,915 600,850 600,720 530,650 475,650 475,580 450,555 325,555 325,655 400,730 515,730 515,825 500,840 390,840 185,635 185,215 385,215 470,300 470,400 515,400 715,600 760,600 760,185 765,180 760,180
GND on Top Layer "GND_L01_P068" (solid, pour order 68): 770,210 770,570 795,595 795,775 860,840 860,925 950,925 1045,830 1045,210
+5 on Top Layer "+5_L01_P072" (solid, pour order 72): 1065,1000 1300,1000 1300,2360 965,2360 700,2095 700,1220.38
+3.3 on Top Layer "+3.3_L01_P085" (solid, pour order 85): 1324.44,2745 1560,2745 1560,3325 1515,3370 1025,3370 1025,3185 955,3115 1350,3115 1440,3025 1435,3020 1435,2870 1410,2845 1330,2845
+3.3 on Top Layer "+3.3_L01_P081" (solid, pour order 81): 640,2940 715,2940 735,2960 735,3050 800,3115 1040,3115 1040,3265 765,3265 765,3370 45,3370 0,3325 0,1435 50,1385 330,1385 360,1415 360,1470 340,1490 185,1490 185,1495 160,1520 160,2855 390,3085 560,3085 560,3005
+5 on Top Layer "+5_L01_P076" (solid, pour order 76): 1300,1250 1435,1250 1435,1360 1260,1360 1235,1335 1235,1270
+5 on Top Layer "+5_L01_P073" (solid, pour order 73): 1300,2240 1445,2240 1445,2360 1275,2360 1260,2345 1260,2235
+5 on Top Layer "+5_L01_P071" (solid, pour order 71): 765,1000 1065,1000 1065,1300
+5 on Top Layer "+5_L01_P070" (solid, pour order 70): 350,930 545,930 635,840 830,840 830,1000 1080,1250 1300,1250 1300,1355 700,1355 635,1330 635,1045 350,1045

## Silkscreen, mask and mechanical layers (free items; w line width, h text height)
Mechanical 1:
  the board outline again, w10

## Text inside footprints (layer, text, board x,y; h text height)
C5: Top Overlay "+" at 910,3225.63 h59.06 r90
P1: Top Overlay "20" at 375,2985 h40 r90; Top Overlay "1" at 375,1105 h40 r90; Top Overlay "10" at 375,1985 h40 r90
P2: Top Overlay "20" at 1225,1125 h40 r270; Top Overlay "1" at 1250,3010 h40 r270; Top Overlay "10" at 1230,2130 h40 r270